# Altium PCB STM32F103_Blue_Pill_V_1_OLD.PcbDoc
Units mm, origin at the board's own origin, x right, y up, seen from the top; angles counter-clockwise.
Board outline 53.59 x 18.25 mm, 2 copper layers (Top Layer, Bottom Layer), stack 1.271 mm thick; 33 components, 50 nets, 164 pads, 22 vias.
Unrouted connection lines stored in the file: 13.
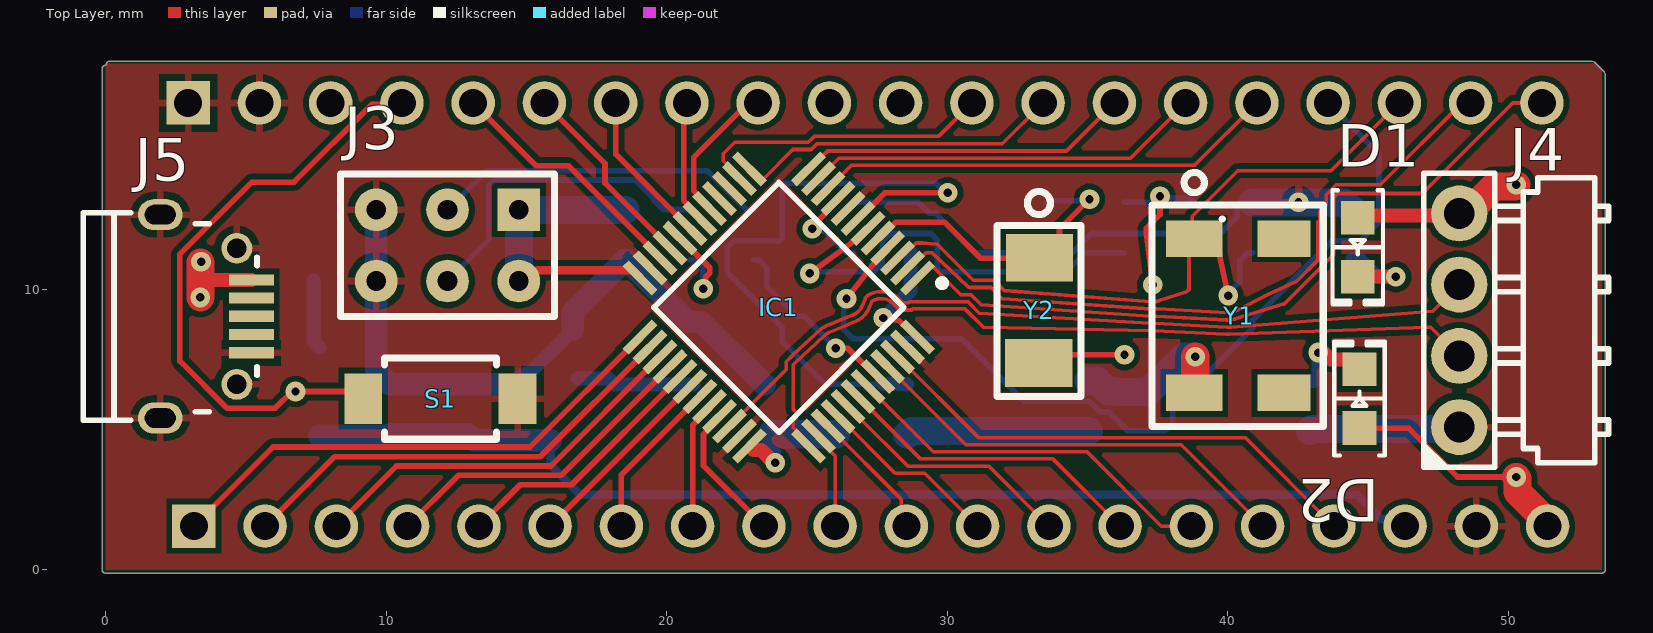
[diagram p0: Top Layer view]
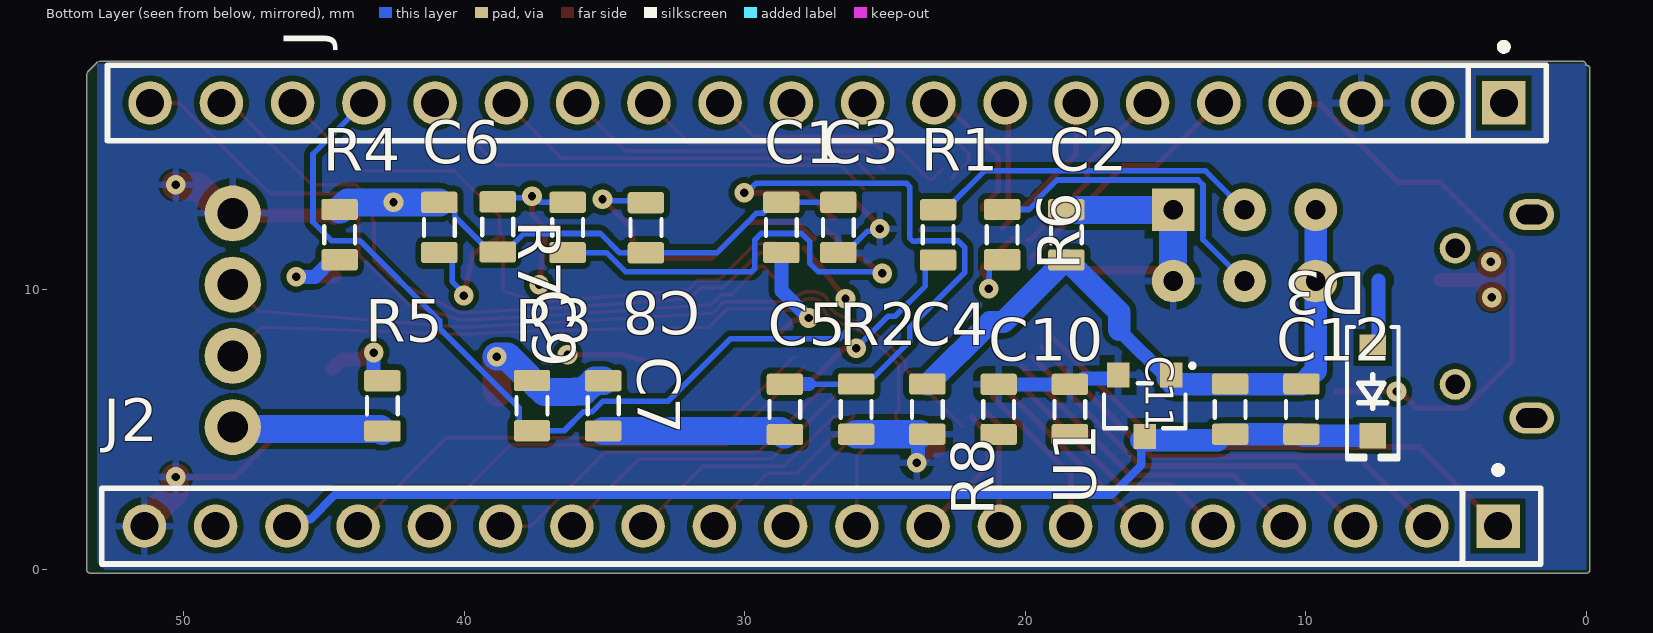
[diagram p1: Bottom Layer view, seen from below]
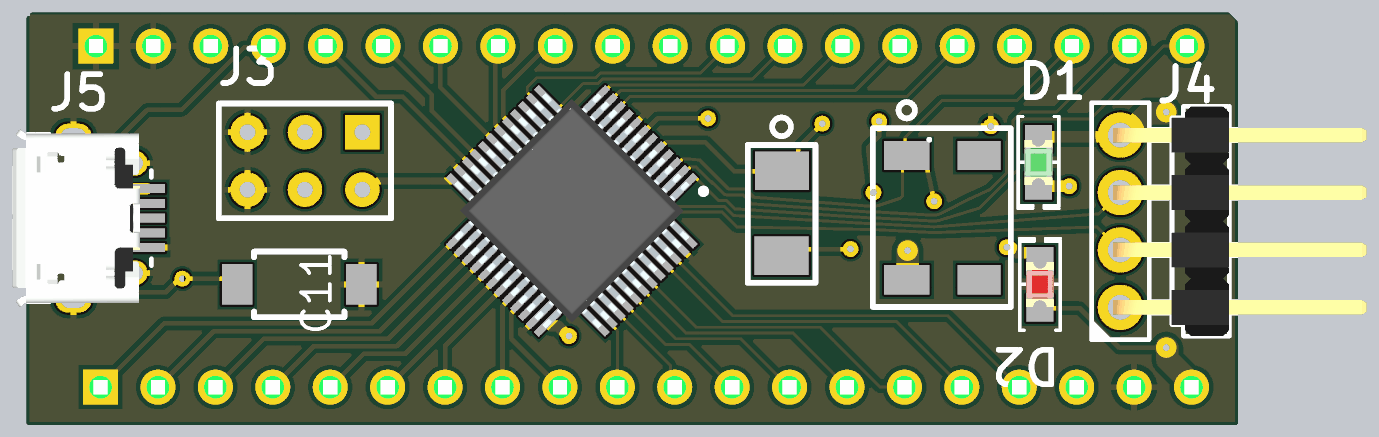
[diagram p2: 3D render of the assembled board from above, using the file's embedded part models]
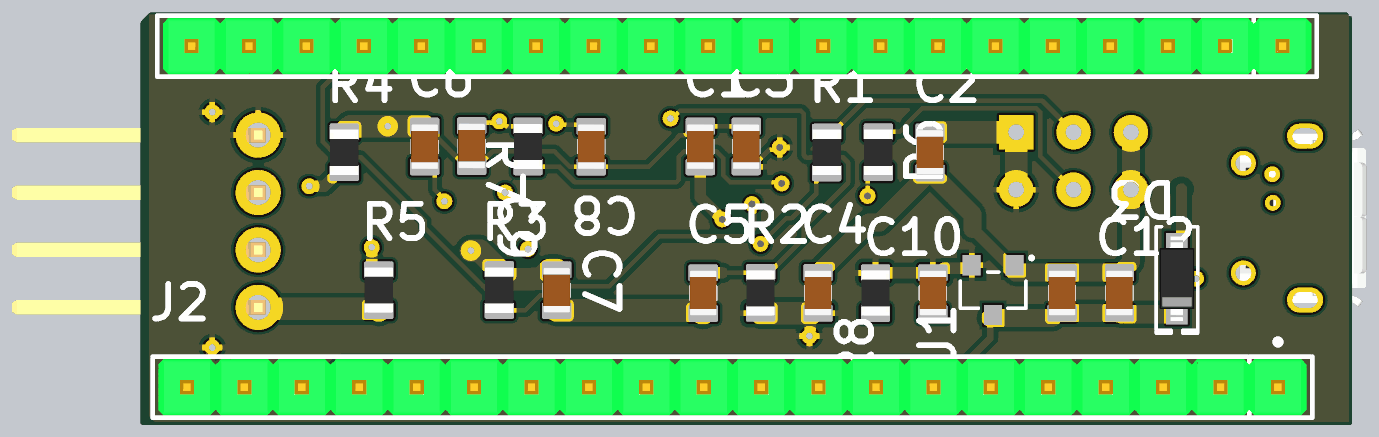
[diagram p3: 3D render of the assembled board from below, using the file's embedded part models]

## Layer stack, top to bottom
Top Solder: solder mask 0.1, Solder Resist, Dk 3.8
Top Layer: signal copper 0.0356
Dielectric 1: dielectric 1.2, FR-4, Dk 4.5
Bottom Layer: signal copper 0.0356
Bottom Solder: solder mask 0.1, Solder Resist, Dk 3.8

## Board outline
0,-0.127 cw(c0,0) -0.127,0 -0.127,17.851 cw(c0,17.851) 0.024,17.976 cw(c0.149,18) 0.149,18.127 53,18.127 53.09,18.09 53.43,17.75 53.467,17.66 53.467,0 cw(c53.34,0) 53.34,-0.127

## Design rules (kind name [scope] priority, off if disabled: settings)
Clearance Clearance_1 [OnMid vs OnMid] p1: gap=0.2 ignorepadtopadclearanceinfootprint=FALSE except(0.127: Arc-Arc Arc-Track Arc-Text Track-Track Track-Text Text-Text) sourcerule=42 cellrowname=All cellrowtype=0 cellcolname=All cellcoltype=0 innerlayers=TRUE
Clearance Clearance_2 [(ExistsOnLayer('Top Layer') Or ExistsOnLayer('Bottom Layer')) vs (ExistsOnLayer('Top Layer') Or ExistsOnLayer('Bottom Layer'))] p2: gap=0.2 ignorepadtopadclearanceinfootprint=FALSE except(0.127: Arc-Arc Arc-Track Arc-Text Track-Track Track-Text Text-Text) sourcerule=42 cellrowname=All cellrowtype=0 cellcolname=All cellcoltype=0 outerlayers=TRUE
Clearance [All] p3: gap=0.254 ignorepadtopadclearanceinfootprint=FALSE ismatrix=TRUE
DiffPairsRouting DiffPair_90 [InDifferentialPair('D_USB_D')] p1: maxlimit=0.254 minlimit=0.127 mostfreqgap=0.254 toplayer_minwidth=0.118 toplayer_maxwidth=0.254 toplayer_prefwidth=0.254 bottomlayer_minwidth=0.118 bottomlayer_maxwidth=0.254 bottomlayer_prefwidth=0.254 maxuncoupledlength=0.254
DiffPairsRouting DiffPair_90DiffPairsRouting [InDifferentialPair('D_USB_D')] p2: maxlimit=0.254 minlimit=0.254 mostfreqgap=0.254 toplayer_minwidth=0.203 toplayer_maxwidth=0.203 toplayer_prefwidth=0.203 bottomlayer_minwidth=0.203 bottomlayer_maxwidth=0.203 bottomlayer_prefwidth=0.203 maxuncoupledlength=12.7
DiffPairsRouting [All] p3: maxlimit=0.254 minlimit=0.254 mostfreqgap=0.254 toplayer_minwidth=0.381 toplayer_maxwidth=0.381 toplayer_prefwidth=0.381 bottomlayer_minwidth=0.381 bottomlayer_maxwidth=0.381 bottomlayer_prefwidth=0.381 maxuncoupledlength=12.7
HoleSize MaxMinHoleSize_JLCPCB [All] p1: absolutevalues=TRUE maxlimit=6.3 minlimit=0.3 maxpercent=80.000 minpercent=20.000
HoleSize [All] p2: absolutevalues=TRUE maxlimit=2.54 minlimit=0.025 maxpercent=80.000 minpercent=20.000
HoleToHoleClearance HoleToHoleClearance_JLCPCB [All] p1: gap=0.5 allowstackedmicrovias=TRUE
MinimumAnnularRing MinimumAnnularRing_JLCPCB [All] p1: minimumring=0.15
PolygonConnect [All] p1: connectstyle=Relief reliefconductorwidth=0.254 reliefentries=4 polygonreliefangle="90 Angle" airgapwidth=0.254
RoutingVias RoutingVia_JLCPCB [All] p1: holewidth=0.3 width=0.5 viastyle="Through Hole" minholewidth=0.3 minwidth=0.5 maxholewidth=6.3 maxwidth=6.5
RoutingVias [All] p2: holewidth=0.711 width=1.27 viastyle="Through Hole" minholewidth=0.711 minwidth=1.27 maxholewidth=0.711 maxwidth=1.27
SolderMaskExpansion [All] p1: expansion=0.102 istentingtop=FALSE
UnRoutedNet [All] p1: checkbadconnections=TRUE
Width MaxMinWidth_JLCPCB [All] p1: maxlimit=10 minlimit=0.127 preferedwidth=0.2 minimp=50.000000 maximp=50.000000 favimp=50.000000
Width [All] p2: maxlimit=0.254 minlimit=0.254 preferedwidth=0.254
26 further rules are at their usual default settings.

## Classes and differential pairs
component class Connector_page: *1 J1 J2 J3 J4 J5 R8
component class Controller_page: C1 C2 C3 C4 C5 C6 C7 C8 C9 C10 C11 C12 D1 D2 D3 IC1 P2 P3 R1 R2 R3 R4 R5 R6 R7 S1 U1 Y1 Y2
differential pair D_USB_D: +USB_D_H -USB_D_L

## Components (designator, comment, footprint, x,y, rotation, side; value= is the part's Value field where it differs from the comment)
C1 "Capacitor 4.7µF +/-40% 25V 0805" CAPC0805(2012)145_L 28.702,12.192 r270 bottom value=104
C2 "Capacitor 4.7µF +/-40% 25V 0805" CAPC0805(2012)145_L 18.542,11.938 r90 bottom value=1uF
C3 "Capacitor 4.7µF +/-40% 25V 0805" CAPC0805(2012)145_L 26.67,12.192 r270 bottom value=104
C4 "Capacitor 4.7µF +/-40% 25V 0805" CAPC0805(2012)145_L 23.495,5.715 r270 bottom value=104
C5 "Capacitor 4.7µF +/-40% 25V 0805" CAPC0805(2012)145_L 28.575,5.715 r90 bottom value=104
C6 "Capacitor 4.7µF +/-40% 25V 0805" CAPC0805(2012)145_L 40.894,12.192 r270 bottom value=15pF
C7 "Capacitor 4.7µF +/-40% 25V 0805" CAPC0805(2012)145_L 35.052,5.842 r90 bottom value=15pF
C8 "Capacitor 4.7µF +/-40% 25V 0805" CAPC0805(2012)145_L 33.528,12.192 r90 bottom value=15pF
C9 "Capacitor 4.7µF +/-40% 25V 0805" CAPC0805(2012)145_L 38.812,12.222 r90 bottom value=15pF
C10 "Capacitor 4.7µF +/-40% 25V 0805" CAPC0805(2012)145_L 18.415,5.715 r90 bottom value=0.1uF
C11 "Capacitor 4.7µF +/-40% 25V 0805" CAPC0805(2012)145_L 12.7,5.715 r270 bottom value=104
C12 "Capacitor 4.7µF +/-40% 25V 0805" CAPC0805(2012)145_L 10.16,5.715 r270 bottom value=104
D1 "Power Supply" "LED 0805_2012 GREEN" 44.64,11.493 r270 top value=Green
D2 "Test" "LED 0805_2012 RED" 44.704,6.096 r90 top value=Red
D3 "Zener 3V3" SOD-123 7.62,6.35 r270 bottom
IC1 "STM32F103C8T6XXX" QFP50P900X900X160-48N 24.003,9.347 r225 top
J1 "2-826646-0" FP-2-826646-0-MFG 27.076,16.637 r0 bottom
J2 "2-826646-0" FP-2-826646-0-MFG 27.28,1.55 r0 bottom
J3 "2x3P" "2x3P 2.54mm Pin Header -Footprint-1" 14.732,12.827 r180 top
J4 "M20-9960445" "HARWIN M20-9960445" 48.26,8.89 r90 top
J5 "MICROXNJ USB 2.0" "USB 2.0 Tupe B Micro" 2,9.029 r90 top
R1 "470R5J" RESC0805(2012)_L 23.114,11.938 r90 bottom value=10K
R2 "470R5J" RESC0805(2012)_L 26.035,5.715 r270 bottom value=10K
R3 "470R5J" RESC0805(2012)_L 37.592,5.842 r270 bottom value=47
R4 "470R5J" RESC0805(2012)_L 44.45,11.938 r270 bottom value=1K
R5 "470R5J" RESC0805(2012)_L 42.926,5.842 r90 bottom value=1K
R6 "470R5J" RESC0805(2012)_L 20.828,11.938 r270 bottom value=10K
R7 "470R5J" RESC0805(2012)_L 36.322,12.192 r270 bottom value=47
R8 "470R5J" RESC0805(2012)_L 20.955,5.715 r90 bottom value=1.5K
S1 "TS-1088-AR02016" TS-1088-AR02016-Footprint-1 11.938,6.096 r180 top
U1 "XC6206P332MR" XC6206P332MR-Footprint-1 15.748,5.842 r0 bottom
Y1 "MC-30632.7680K-A0:ROHS" MC-30632.7680K-A0:ROHS-Footprint-1 38.812,11.799 r270 top
Y2 "X50328MSB2GI" X50328MSB2GI-Footprint-1 33.274,11.066 r270 top

## Footprints (in the part's own frame and the unit in brackets; to place one, negate y for a bottom-side part, rotate by r counter-clockwise, add the part's x,y. Pads: shape width x height; smd on the part's side, far side on the other; paste and mask are expansions set on the pad)
"2x3P 2.54mm Pin Header -Footprint-1" [mil]
  rect 60x60 hole 27.56: 1(0,0)
  round 60 hole 27.56: 2(0,100) 3(100,0) 4(100,100) 5(200,0) 6(200,100)
  silkscreen extent -50,-50 250,150
CAPC0805(2012)145_L [mm] "Chip Capacitor, Body 2.0x1.2mm, Height 1.45mm, IPC High Density"
  rrect25% 0.76x1.3 smd: 1(-0.9,0) 2(0.89,0)
  silkscreen extent -0.3,-0.55 0.3,0.55, body extent -1,-0.6 1,0.6, height 1.45
FP-2-826646-0-MFG [mm]
  rect 1.55x1.55 hole 1 paste-2539.97 mask+0: 1(-24.13,0)
  round 1.55 hole 1 paste-2539.97 mask+0: 2(-21.59,0) 3(-19.05,0) 4(-16.51,0) 5(-13.97,0) 6(-11.43,0) 7(-8.89,0) 8(-6.35,0) 9(-3.81,0) 10(-1.27,0) 11(1.27,0) 12(3.81,0) 13(6.35,0) 14(8.89,0) 15(11.43,0) 16(13.97,0) 17(16.51,0) 18(19.05,0) 19(21.59,0) 20(24.13,0)
  silkscreen extent -25.65,-2.12 25.65,1.35, body extent -25.4,-1.25 25.4,1.25, height 9
"HARWIN M20-9960445" [mm] "2.54mm DIL PC TAIL PIN HEADER ASSEMBLY"
  round 2 hole 1.1: 1(-3.81,0) 2(-1.27,0) 3(1.27,0) 4(3.81,0)
  silkscreen extent -5.24,-5.33 5.24,1.3, body extent -5.08,-10.9 5.08,0.32, height 2.54
"LED 0805_2012 GREEN" [mm] "Chip Diode, 2-Leads, Body 2.00x1.25mm, IPC Medium Density"
  rect 1.2x1.2 smd: 1(-1.05,0) 2(1.05,0)
  silkscreen extent -2.03,-0.9 2.03,0.9, body extent -1,-0.63 1,0.63, height 0.9
"LED 0805_2012 RED" [mm] "Chip Diode, 2-Leads, Body 2.00x1.25mm, IPC Medium Density"
  rect 1.2x1.2 smd: 1(-1.05,0) 2(1.05,0)
  silkscreen extent -2.03,-0.9 2.03,0.9, body extent -1,-0.63 1,0.63, height 0.9
MC-30632.7680K-A0:ROHS-Footprint-1 [mm]
  rect 1.3x2 smd: 1(0,0) 2(5.5,0)
  rect 1.3x1.9 smd: 4(0,3.2) 13(5.5,3.2)
  silkscreen extent -2.36,-1.5 6.7,4.6, body extent -1,-1.3 6.5,4.4, height 1.2
QFP50P900X900X160-48N [mm]
  rect 1.475x0.3 smd: 1(-4.238,2.75) 2(-4.238,2.25) 3(-4.238,1.75) 4(-4.238,1.25) 5(-4.238,0.75) 6(-4.238,0.25) 7(-4.238,-0.25) 8(-4.238,-0.75) 9(-4.238,-1.25) 10(-4.238,-1.75) 11(-4.238,-2.25) 12(-4.238,-2.75) 25(4.238,-2.75) 26(4.238,-2.25) 27(4.238,-1.75) 28(4.238,-1.25) 29(4.238,-0.75) 30(4.238,-0.25) 31(4.238,0.25) 32(4.238,0.75) 33(4.238,1.25) 34(4.238,1.75) 35(4.238,2.25) 36(4.238,2.75)
  rect 0.3x1.475 smd: 13(-2.75,-4.238) 14(-2.25,-4.238) 15(-1.75,-4.238) 16(-1.25,-4.238) 17(-0.75,-4.238) 18(-0.25,-4.238) 19(0.25,-4.238) 20(0.75,-4.238) 21(1.25,-4.238) 22(1.75,-4.238) 23(2.25,-4.238) 24(2.75,-4.238) 37(2.75,4.238) 38(2.25,4.238) 39(1.75,4.238) 40(1.25,4.238) 41(0.75,4.238) 42(0.25,4.238) 43(-0.25,4.238) 44(-0.75,4.238) 45(-1.25,4.238) 46(-1.75,4.238) 47(-2.25,4.238) 48(-2.75,4.238)
  silkscreen extent -4.85,-3.15 3.15,3.62, body extent -4.5,-4.5 4.5,4.5, height 1.6
RESC0805(2012)_L [mm] "Chip Resistor, Body 2.0x1.3mm, IPC High Density"
  rrect25% 0.76x1.3 smd: 1(-0.9,0) 2(0.89,0)
  silkscreen extent -0.3,-0.55 0.3,0.55, body extent -1,-0.62 1,0.63, height 0.6
SOD-123 [mm] "SOD, 2-Leads, Body 1.55x3.70mm, IPC Medium Density"
  rect 0.9x0.95 smd: 1(-1.575,0) 2(1.575,0)
  silkscreen extent -2.3,-0.92 2.41,0.92, body extent -1.86,-0.78 1.86,0.77, height 1.35
TS-1088-AR02016-Footprint-1 [mm]
  rect 1.35x1.8 smd: 1(-2.75,0) 2(2.75,0)
  silkscreen extent -2,-1.45 2,1.45, body extent -2,-1.5 2,1.44, height 2.5
"USB 2.0 Tupe B Micro" [mm] "USB 2.0 Type B Micro"
  rect 0.4x1.6 smd: 1(1.3,-3.2) 2(0.65,-3.2) 3(0,-3.2) 4(-0.65,-3.2) 5(-1.3,-3.2)
  round 1.1 hole 0.7: 6(-2.425,-2.68) 9(2.425,-2.68)
  oval 1.1x1.6 hole 0.7 slot 1.1 at 90 deg: 7(-3.625,0.05) 8(3.625,0.05)
  silkscreen extent -3.7,-3.4 3.7,2.8, body extent -3.93,-2.9 3.93,2.76, height 2.78
X50328MSB2GI-Footprint-1 [mm]
  rect 1.7x2.4 smd: 1(-0.056,0.022) 2(3.7,0)
  silkscreen extent -2.41,-1.5 4.9,1.5, body extent -1.2,-1.5 4.9,1.5, height 1.2
XC6206P332MR-Footprint-1 [mm]
  rect 0.8x0.9 smd: 1(-0.95,-1.1) 2(0.95,-1.1) 3(0,1.1)
  silkscreen extent -1.77,-1.5 1.45,0.8, body extent -1.45,-0.82 1.45,0.8, height 1.2

## Part data
C1 C2 C3 C4 C5 C6 C7 C8 C9 C10 C11 C12: library part CMP-001-00080-4, "Chip Capacitor, 4.7µF +/-40%, 25V, 0805, Thickness 1.45 mm", Case/Package=0805, Max Operating Temperature=85°C, Min Operating Temperature=-55°C, Tolerance=20%, Voltage Rating=25V, Mounting Technology=SMT, Pins=2
D1: library part APHCM2012CGCK-F01, "LED GREEN CLEAR CHIP SMD", Color=Green, Current - Test=20mA, Device Package="0805 (2012 Metric)", Lens Color=Colorless, Manufacturer=Kingbright, Millicandela Rating=50mcd, Supplier Device Package="Chip LED", Supplier Part Number 1=754-1094-1-ND, Voltage - Forward (Vf) (Typ)=2.1V, ComponentLink1Description=Datasheet, ComponentLink1URL=http://www.kingbrightusa.com/images/catalog/SPEC/APHCM2012CGCK-F01.pdf, ComponentLink2Description="DigiKey Link", ComponentLink2URL=https://www.digikey.com/en/products/detail/kingbright/APHCM2012CGCK-F01/1747492, Configuration=Standard, Height (Max)=0.40mm, LastUpdated="3/11/2024 7:52:47 AM", Lens Size="1.30mm x 1.25mm", Lens Style="Rectangle with Flat Top", Lens Transparency=Clear, Lifecycle Status=Active, Minimum Order=1, Mounting Type="Surface Mount", Package / Case="0805 (2012 Metric)", Packaging=TapeAndReel, Part Number=APHCM2012CGCK-F01, Part Status=Active, PartId=241, Price=0.05, Series=-, Size / Dimension="2.00mm L x 1.25mm W", Supplier 1=DigiKey, Viewing Angle=110°, Wavelength - Dominant=570nm, Wavelength - Peak=574nm
D2: library part LTST-C170KAKT, "LED RED CLEAR SMD", Color=Red, Current - Test=20mA, Device Package="0805 (2012 Metric)", Lens Color=Colorless, Manufacturer="Lite-On Inc.", Millicandela Rating=54mcd, Supplier Part Number 1=160-1412-1-ND, Voltage - Forward (Vf) (Typ)=2V, ComponentLink1Description=Datasheet, ComponentLink1URL=http://optoelectronics.liteon.com/upload/download/DS-22-99-0182/LTST-C170KAKT.pdf, ComponentLink2Description="DigiKey Link", ComponentLink2URL=http://digikey.com/product-detail/en/lite-on-inc/LTST-C170KAKT/160-1412-1-ND/386772, Configuration=Standard, Height (Max)=1.10mm, LastUpdated="3/11/2024 7:52:22 AM", Lens Size="1.40mm x 1.25mm", Lens Style="Rectangle with Flat Top", Lens Transparency=Clear, Lifecycle Status=Active, Minimum Order=1, Mounting Type="Surface Mount", Package / Case="0805 (2012 Metric)", Packaging=TapeAndReel, Part Number=LTST-C170KAKT, Part Status=Active, PartId=305, Price=0.07, Series=-, Size / Dimension="2.00mm L x 1.25mm W", Supplier 1=DigiKey, Viewing Angle=130°, Wavelength - Dominant=615nm, Wavelength - Peak=621nm
D3: library part BZT52C3V3-HE3-18, "DIODE ZENER 3.3V 410MW SOD123", Manufacturer="Vishay Semiconductor Diodes Division", Operating Temperature="-55°C ~ 150°C", Package / Case=SOD-123, Power - Max=410mW, Supplier Part Number 1=BZT52C3V3-HE3-18GICT-ND, Tolerance=±5%, Voltage - Zener (Nom) (Vz)=3.3V, ComponentLink1Description=Datasheet, ComponentLink1URL=http://www.vishay.com/docs/85760/bzt52.pdf, ComponentLink2Description="DigiKey Link", ComponentLink2URL=http://digikey.com/product-detail/en/vishay-semiconductor-diodes-division/BZT52C3V3-HE3-18/BZT52C3V3-HE3-18GICT-ND/7717359, Impedance (Max) (Zzt)="80 Ohms", LastUpdated="3/11/2024 7:47:45 AM", Lifecycle Status=Active, Minimum Order=1, Mounting Type="Surface Mount", Packaging=TapeAndReel, Part Number=BZT52C3V3-HE3-18, Part Status=Active, PartId=1614, Price=0.04, Series="Automotive, AEC-Q101", Supplier 1=DigiKey, Supplier Device Package=SOD-123
IC1: "Integrated Circuit", Manufacturer_Name=ST, Height=1.6mm, Manufacturer_Part_Number=STM32F103C8T6XXX
J1 J2: library part CMP-03369-000139-1, "CONN HEADER VERT 20POS 2.54MM", Color=Green, Current Rating=3A, Flammability Rating="UL94 V-0", High Temperature Housing=No, Max Operating Temperature=105°C, Min Operating Temperature=-65°C, Package Quantity=300, Board Standoff="No (Without)", Connector Type=Plug, Contact Gender=Male, Contact Material=Bronze, Contact Mating Length=5.8mm, Contact Plating=Gold, Contact Post Length=0.1259inch, Contact Protection="No (Without)", Contact Shape=Square, Contact Type="Male Pin", Depth=2.5mm, ELV=Compliant, Gasket="No (Without)", High Speed Serial Data Connector=No, Housing Color=Green, Housing Material=PBT, Keyed=No, Length=50.8mm, Mating Alignment="No (Without)", Mating Connector Lock="No (Without)", Mount="Straddle Mount", Number of Contacts=20, Number of Positions=20, Number of Rows=1, Orientation=Straight, Packaging=Carton, PCB Mount Retention=Without, PCB Mounting Orientation=Vertical, Pitch=2.54mm, Plating Thickness=0.8um, Radiation Hardening=No, RoHS Compliant=Yes, Row Spacing=2.54mm, Selectively Loaded="No (Without)", Series="AMPMODU MOD II", Stabilizers="No (Without)", Strain Relief="No (Without)", Termination="Through Hole"
J3: library part CMP-002-00390-1, "PZ254-2-03-Z-8.5", Case/Package="Plugin, P=2.54mm", Max Current Rating=3A, Connector Type="Pin Header", Gender=Male, Mounting Technology=TH, Pins=6, RoHS Compliant=Yes
J4: "CONN HEADER R/A 4POS 2.54MM", Current Rating (Amps)="3A per Contact", Insulation Color=Black, Manufacturer="Harwin Inc.", Material Flammability Rating="UL94 V-0", Operating Temperature="-40°C ~ 105°C", Supplier Part Number 1=952-3286-ND, ComponentLink1Description=Datasheet, ComponentLink1URL=https://cdn.harwin.com/pdfs/Harwin_PC_Connectors_M20.pdf, ComponentLink2Description="DigiKey Link", ComponentLink2URL=https://www.digikey.com/en/products/detail/harwin-inc/M20-9960445/3921052, Connector Type="Header, Cuttable", Contact Finish - Mating=Gold, Contact Length - Mating="0.240\" (6.10mm)", Contact Length - Post="0.118\" (3.00mm)", Contact Material=Brass, Contact Shape=Square, Contact Type="Male Pin", Fastening Type=Push-Pull, Insulation Height="0.100\" (2.54mm)", Insulation Material="Polyamide (PA6T), Nylon 6T", LastUpdated="9/21/2022 7:23:20 PM", Lifecycle Status=Active, Minimum Order=1, Mounting Type="Through Hole, Right Angle", Number of Positions=4, Number of Positions Loaded=All, Number of Rows=1, Packaging=Bulk, Part Number=M20-9960445, Part Status=Active, PartId=167, Pitch - Mating="0.100\" (2.54mm)", Price=0.11, Row Spacing - Mating="-40°C ~ 105°C", Series=M20, Shrouding=Unshrouded, Style="Board to Board or Cable", Supplier 1=DigiKey, Termination=Solder
J5: library part CMP-002-00071-9, "1A USB 2.0 1 Surface Mount 5P Female -20℃~+85℃ Micro-B SMD USB Connectors ROHS", Case/Package="USB 2.0", Max Current Rating=1A, Max Operating Temperature=85°C, Min Operating Temperature=-25°C, Connector Type=Micro-B, Gender=Female, Mounting Technology=SMD, Pins=9, RoHS Compliant=Yes
R1 R2 R3 R4 R5 R6 R7 R8: library part CMP-009-00102-2, "470R 0.125W 5% 0805 (2012 Metric)  SMD", Case/Package=0805, Power=125mW, Tolerance=5%, Mounting Technology=SMT, Pins=2
S1: library part CMP-011-00069-3, "NO 50mA 100MΩ 100000 Times 12V 160gf@±50gf Brick nogging SPST SMD Tactile Switches ROHS", Case/Package=SMD, Current Rating=50mA, Voltage Rating=12V, Pins=2, RoHS Compliant=Yes, Throw Configuration=SPST
U1: library part CMP-019-00049-3, "200mA Fixed 3.3V Positive 6V SOT-23-3L Linear Voltage Regulators (LDO) ROHS", Case/Package=SOT-23-3L, Dropout Voltage=680mV, Output Current=200mA, Output Voltage=3.3V, Pins=3
Y1: library part CMP-003-00031-7, "32.768 kHz ±20ppm Crystal 12.5pF 50 kOhms 4-SOJ, 5.50mm pitch", Case/Package="4-SOJ 5.50mm pitch", Frequency=32.768kHz, Load Capacitance=12.5pF, Max Operating Temperature=85°C, Min Operating Temperature=-40°C, ESR=50k, Mounting Technology="PARALLEL - FUNDAMENTAL", Pins=4, RoHS Compliant=Yes
Y2: library part CMP-003-00032-3, "8MHz 20pF ±10ppm SMD5032-2P Crystals ROHS", Case/Package=SMD5032-2P, Frequency=8MHz, Load Capacitance=20pF, Max Operating Temperature=125°C, Min Operating Temperature=-40°C, ESR=80, Mounting Technology=SMD, Pins=2, RoHS Compliant=Yes

## Via types
v1: diameter 0.7, hole 0.3, Top Layer to Bottom Layer, 22 vias

## Nets (pads, with @x,y where several pads share a name; then routed paths per layer and width w, separated by ;. In a path a pad name is that pad's centre, name@x,y a point inside that pad or via, vN(x,y) a via of type N, cw(c..) or ccw(c..) an arc to the next point about the centre after c; other vN are vias at no path point)
+3V3: C1.2 C2.2 C3.2 C4.2 C10.2 D1.1 D2.1 IC1.9 IC1.24 IC1.36 IC1.48 J1.3 J2.20 J3.1 J3.2 J4.4 R2.2 R8.2 U1.2 | length 42.1
  Top Layer w0.2: IC1.36 22.953,4.408 23.104,4.257 ; v1(25.192,12.153) 25.192,12.233 26.116,13.157 IC1.9 ; v1(27.731,8.97) 28.3,8.869 28.458,8.71 IC1.48 ; D2.1 46.456,5.046 48.2,3.302 v1(50.292,3.302)
  Top Layer w0.3: J3.2 15.009,10.287 15.395,10.673 18.788,10.673 IC1.24
  Top Layer w0.5: 23.104,4.257 23.375,4.257 23.822,3.81 v1(23.876,3.81) ; D1.1 44.719,12.622 48.182,12.622 J4.4
  Top Layer w1: J4.4 48.531,12.7 49.495,13.664 50.24,13.664 v1(50.292,13.716) ; v1(50.292,3.302) 50.344,3.25 50.344,2.765 51.41,1.699 J2.20
  Bottom Layer w0.2: v1(25.192,12.153) 25.288,12.057 25.645,12.057 26.4,11.302 C3.2
  Bottom Layer w0.5: U1.2@16.825,6.815 17.935,6.815 18.145,6.605 C10.2 R8.2 ; C4.2 23.765,4.825 23.838,4.752 23.838,3.848 v1(23.876,3.81) ; v1(27.731,8.97) 28.702,9.942 C1.2
  Bottom Layer w1: J3.2 J3.1 C2.2 ; C4.2@23.765,4.825 R2.2
+5V: C11.2 C12.2 D3.2 J2.18 U1.3 | length 40.6
  Bottom Layer w0.3: U1.3@15.875,4.615 15.875,3.715 16.915,2.675 44.609,2.675 45.495,1.789 46.09,1.789 J2.18
  Bottom Layer w0.8: D3.2 10.11,4.775 C12.2 C11.2 12.93,4.825 13.14,4.615 U1.3@15.875,4.615
BOOT0: J3.3 R1.2 | length 12.1
  Bottom Layer w0.2: J3.3 13.581,14.216 21.456,14.216 22.844,12.828 R1.2
BOOT1: J3.4 R6.1 | length 11.7
  Bottom Layer w0.2: J3.4 13.675,11.77 13.675,11.936 13.67,11.941 13.67,13.713 13.846,13.889 18.88,13.889 19.569,13.199 19.569,13.147 19.878,12.838 R6.1
GND: C1.1 C2.1 C3.1 C4.1 C5.1 C6.1 C7.1 C8.1 C9.1 C10.1 C11.1 C12.1 IC1.8 IC1.23 IC1.35 IC1.47 J1.1 J1.2 J2.19 J3.5 J3.6 J4.1 J5.5 J5.6 J5.7 J5.8 J5.9 R4.1 R5.1 S1.1 U1.1 | length 55.8
  Bottom Layer w0.2: C3.1 C1.1 28.972,13.092 29.364,12.7 29.601,12.7 29.718,12.583 29.718,12.573 30.999,11.292 C8.1 34.464,11.292 35.154,11.982 37.881,11.982 38.542,11.322 C9.1 39.082,11.322 40.344,12.584 40.344,12.812 40.624,13.092 C6.1
  Bottom Layer w0.5: U1.1@14.925,6.815 16.659,8.549
  Bottom Layer w0.8: J3.5 J3.6 9.652,7.093 10.13,6.615 C12.1 C11.1 14.725,6.615 U1.1@14.925,6.815 ; 16.659,8.549 16.659,9.185 18.512,11.038 C2.1 18.572,11.038 20.783,8.827 21.253,8.827 23.465,6.615 C4.1
  Bottom Layer w1: C5.1 28.605,4.815 28.732,4.942 C7.1 ; C6.1 44.166,13.092 44.42,12.838 R4.1 ; R5.1 42.995,5.011 48.191,5.011 J4.1
  other v1: 42.53,13.092
NetC7_2: C7.2 R3.1 Y1.2 | length 5.4
  Top Layer w1: Y1.2 38.849,6.449 v1(38.849,7.591)
  Bottom Layer w1: C7.2 35.366,6.732 35.749,6.349 36.072,6.349 36.096,6.325 37.145,6.325 R3.1@37.442,6.622 ; R3.1@37.742,6.862 38.471,7.591 v1(38.849,7.591)
NetC9_2: C9.2 R7.1 Y2.2 | length 9.1
  Top Layer w0.2: Y2.2 34.374,7.66 v1(36.326,7.66) ; v1(37.338,10.16) 37.11,12.007 37.11,12.172 37.592,12.654 v1(37.592,13.31)
  Bottom Layer w0.2: R7.1 37.293,13.092 37.511,13.31 v1(37.592,13.31) 37.649,13.252 38.671,13.252 C9.2
NetD1_2: D1.2 R4.2 | length 3.2
  Top Layer w0.5: D1.2 45.995,10.443 v1(45.999,10.439)
  Bottom Layer w0.5: R4.2 44.72,11.048 45.329,10.439 v1(45.999,10.439)
NetD2_2: D2.2 R5.2 | length 3
  Top Layer w0.5: v1(43.237,7.738) 43.445,7.738 43.687,7.496 44.354,7.496 D2.2
  Bottom Layer w0.5: R5.2 43.107,6.732 43.237,6.862 v1(43.237,7.738)
NetIC1_20: IC1.20 R6.2 | length 3.7
  Top Layer w0.2: IC1.20 20.486,11.814 21.538,10.761 21.538,10.579 21.401,10.442 21.401,10.107 v1(21.305,10.011)
  Bottom Layer w0.2: R6.2 21.014,11.048 21.294,10.768 21.294,10.022 v1(21.305,10.011)
NetIC1_44: IC1.44 R1.1 | length 6.5
  Top Layer w0.2: v1(26.038,7.89) 26.461,7.89 27.47,6.881 IC1.44
  Bottom Layer w0.2: R1.1 23.289,11.038 23.569,10.758 23.569,10.115 24.653,9.031 24.897,9.031 v1(26.038,7.89)
NRST: C5.2 IC1.7 J1.4 R2.1 S1.2 | length 44
  Top Layer w0.2: S1.2@8.934,6.35 v1(6.77,6.35) 6.64,6.35 6.044,5.754 4.328,5.754 2.651,7.431 2.651,11.249 5.216,13.814 6.723,13.814 9.491,16.582 10.511,16.582 J1.4 ; IC1.7 26.868,12.521 27.784,13.437 v1(30.023,13.437)
  Bottom Layer w0.2: 27.725,6.61 25.648,6.61 24.13,8.128 24.13,8.623 22.164,10.589 22.164,11.487 22.395,11.718 23.833,11.718 23.847,11.703 24.013,11.703 24.13,11.821 24.13,13.655 24.247,13.772 29.606,13.772 29.942,13.437 v1(30.023,13.437)
  Bottom Layer w0.5: 27.725,6.61 28.57,6.61 C5.2
PA0-WKUP: IC1.10 J1.16 | length 16.5
  Top Layer w0.13: IC1.10 26.592,14.412 38.821,14.412 J1.16
PA1: IC1.11 J1.15 | length 14.2
  Top Layer w0.13: IC1.11 26.142,14.669 36.538,14.669 J1.15
PA2: IC1.12 J1.14 | length 11.9
  Top Layer w0.13: IC1.12 25.1,14.288 25.737,14.926 34.255,14.926 J1.14
PA3: IC1.13 J1.13 | length 11.8
  Top Layer w0.127: IC1.13 23.322,13.917 23.442,13.917 24.503,14.978 25.158,14.978 25.361,15.181 31.97,15.181 J1.13
PA4: IC1.14 J1.12 | length 10.7
  Top Layer w0.127: IC1.14 22.597,14.006 22.023,14.58 22.023,14.828 22.43,15.235 25.051,15.235 25.26,15.443 29.693,15.443 J1.12
PA5: IC1.15 J1.11
PA6: IC1.16 J1.10
PA7: IC1.17 J1.9 | length 5.3
  Top Layer w0.2: IC1.17 21.537,12.945 20.963,13.519 20.963,14.692 23.009,16.739 23.19,16.739 23.19,16.713 J1.9
PA8: IC1.29 J2.5 | length 9.4
  Top Layer w0.203: J2.5 14.782,3.023 16.618,3.023 IC1.29
PA9: IC1.30 J2.6 | length 7
  Top Layer w0.203: J2.6 15.851,1.55 20.828,6.527 IC1.30
PA10: IC1.31 J2.7 | length 5.8
  Top Layer w0.203: J2.7 18.39,3.38 IC1.31
PA15: IC1.38 J2.10 | length 3.5
  Top Layer w0.127: IC1.38 25.409,4.649 26.01,4.048 J2.10
PB0: IC1.18 J1.8 | length 4.4
  Top Layer w0.2: J1.8 20.609,16.52 20.609,13.165 21.183,12.591 IC1.18
PB1: IC1.19 J1.7 | length 5.6
  Top Layer w0.2: J1.7 18.186,14.81 IC1.19
PB3: IC1.39 J2.11 | length 4.7
  Top Layer w0.127: IC1.39 28.36,2.516 28.36,1.74 J2.11
PB4: IC1.40 J2.12 | length 6.6
  Top Layer w0.127: IC1.40 28.146,3.437 29.203,3.437 J2.12
PB5: IC1.41 J2.13 | length 8.5
  Top Layer w0.127: IC1.41@26.714,5.454 26.836,5.454 28.599,3.691 31.489,3.691 J2.13
PB6: IC1.42 J2.14 | length 11.3
  Top Layer w0.127: IC1.42 29.052,3.945 33.775,3.945 J2.14
PB7: IC1.43 J2.15 | length 13.6
  Top Layer w0.127: IC1.43 29.505,4.199 34.99,4.199 37.638,1.55 J2.15
PB8: IC1.45 J2.16 | length 15.7
  Top Layer w0.127: IC1.45 30.665,4.453 38.347,4.453 J2.16
PB9: IC1.46 J2.17 | length 18.1
  Top Layer w0.127: IC1.46 31.118,4.707 40.633,4.707 J2.17
PB10: IC1.21 J1.6 | length 6.7
  Top Layer w0.2: J1.6 17.806,14.478 17.806,13.777 19.82,11.763 IC1.21@19.891,11.763
PB11: IC1.22 J1.5 | length 9
  Top Layer w0.2: J1.5 15.346,14.397 16.507,14.397 19.769,11.135 IC1.22
PB12: IC1.25 J2.1 | length 18.7
  Top Layer w0.203: J2.1 5.968,4.369 15.136,4.369 IC1.25
PB13: IC1.26 J2.2 | length 16.4
  Top Layer w0.203: J2.2 8.163,4.024 15.497,4.024 IC1.26
PB14: IC1.27 J2.3 | length 14
  Top Layer w0.203: J2.3 10.373,3.694 15.875,3.694 IC1.27
PB15: IC1.28 J2.4 | length 11.7
  Top Layer w0.203: J2.4 12.583,3.364 16.252,3.364 IC1.28
PC13: IC1.2 J1.19 | length 25
  Top Layer w0.13: IC1.2 29.126,11.168 29.25,11.292 29.469,11.292 30.737,10.095 ccw(c30.826,10.189) 30.826,10.059 31.571,10.059 31.935,9.695 31.973,9.657 37.278,9.29 ccw(c37.338,10.16) 37.473,9.298 37.482,9.298 cw(c37.482,9.168) 37.49,9.298 39.989,9.156 ccw(c40.024,9.77) 40.304,9.223 41.457,9.814 42.467,10.28 43.227,11.039 43.227,12.399 43.283,12.455 43.283,12.76 43.518,12.996 43.518,13.36 43.875,13.716 45.441,13.716 48.362,16.637 J1.19
SWCLK: IC1.37 J4.2 | length 28.7
  Top Layer w0.127: IC1.37 25.055,4.528 24.518,5.066 24.518,5.284 24.625,5.391 24.625,5.601 24.518,5.708 24.518,7.249 24.518,7.302 24.592,7.376 25.618,8.337 cw(c26.038,7.89) 25.683,8.39 cw(c26.038,7.89) 25.802,8.456 26.75,8.851 ccw(c26.416,9.652) 27.213,9.309 27.323,9.565 cw(c27.653,9.048) 27.345,9.578 cw(c27.653,9.048) 28.088,9.481 28.314,9.254 28.743,9.254 28.781,9.293 30.641,9.293 31.261,8.673 31.298,8.636 37.307,8.522 ccw(c37.338,10.16) 37.356,8.522 cw(c37.357,8.395) 37.363,8.521 39.954,8.39 ccw(c40.024,9.77) 40.072,8.389 47.14,8.635 47.245,8.635 J4.2
SWDIO: IC1.34 J4.3 | length 28.8
  Top Layer w0.127: IC1.34 24.264,7.133 24.264,7.407 24.487,7.63 25.512,8.585 25.59,8.633 cw(c26.038,7.89) 25.614,8.647 25.658,8.671 25.704,8.69 26.651,9.085 ccw(c26.416,9.652) 26.979,9.409 27.09,9.665 27.109,9.71 27.143,9.744 27.164,9.765 27.174,9.773 27.18,9.776 27.216,9.797 cw(c27.653,9.048) 27.243,9.812 cw(c27.653,9.048) 28.104,9.789 28.193,9.735 28.42,9.508 28.638,9.508 28.676,9.547 30.746,9.547 31.149,9.144 37.255,8.778 ccw(c37.338,10.16) 37.394,8.777 37.396,8.777 cw(c37.396,8.65) 37.403,8.776 39.965,8.644 ccw(c40.024,9.77) 40.113,8.646 47.316,9.216 J4.3
USB_D_H: IC1.33 J2.9 J5.3 R8.1 | length 5
  Top Layer w0.203: IC1.33 21.89,5.398 21.315,4.823 21.315,3.705 J2.9
USB_D_L: IC1.32 J2.8 J5.2 | length 4.5
  Top Layer w0.203: J2.8 20.93,5.145 21.537,5.752 IC1.32
VBAT: IC1.1 J1.20 | length 27.3
  Top Layer w0.13: IC1.1 29.36,10.815 29.48,10.815 30.493,9.802 30.852,9.802 31.216,9.438 37.263,9.034 ccw(c37.338,10.16) 37.437,9.035 37.442,9.035 cw(c37.442,8.905) 37.449,9.035 39.977,8.899 ccw(c40.024,9.77) 40.279,8.936 42.022,9.471 43.775,11.225 43.775,13.253 43.931,13.409 46.937,13.409 50.165,16.637 J1.20
VCCIN: D3.1 J5.1 | length 5.5
  Top Layer w0.5: 3.378,10.325 3.382,10.329 J5.1
  Top Layer w1: v1(3.378,9.703) 3.378,10.325 v1@3.378,10.947
  Bottom Layer w0.5: 7.417,10.312 7.417,8.125 7.617,7.925 D3.1
  other v1: 3.404,10.973
XTALA: C8.2 IC1.5 Y2.1 | length 11.4
  Top Layer w0.2: IC1.5 27.601,11.814 28.175,12.388 29.903,12.388 31.191,11.1 34.004,11.1 34.008,11.096 34.008,12.138 v1(35.077,13.208)
  Bottom Layer w0.2: C8.2 33.597,13.151 35.02,13.151 v1(35.077,13.208)
XTALB: IC1.6 R7.2 | length 16.3
  Top Layer w0.2: v1(25.104,10.559) 26.532,11.593 26.69,11.752 IC1.6
  Bottom Layer w0.2: v1(25.104,10.559) 25.167,10.622 27.389,10.622 27.686,10.919 27.686,11.685 27.983,11.982 29.421,11.982 29.652,11.751 29.652,10.729 29.769,10.612 34.247,10.612 34.937,11.302 R7.2
XTALC: C6.2 IC1.3 J1.18 Y1.1 | length 27.7
  Top Layer w0.13: IC1.3 28.771,11.524 28.896,11.645 29.116,11.645 29.646,11.599 30.929,10.316 31.677,10.316 32.042,9.952 37.291,9.547 ccw(c37.338,10.16) 37.532,9.576 38.549,9.914 38.587,9.952 38.625,9.99 38.625,11.122 38.62,11.127 38.62,11.849 38.738,11.968 38.738,12.598 40.364,14.224 43.686,14.224 46.099,16.637 J1.18
  Top Layer w0.2: Y1.1 39.712,11.249 v1(40.024,9.77)
  Bottom Layer w0.2: v1(40.024,9.77) 40.024,9.858 40.439,10.274 40.439,11.022 40.719,11.302 C6.2
XTALD: IC1.4 J1.17 R3.2 | length 32.6
  Top Layer w0.2: v1(26.416,9.652) 27.31,10.815 27.468,10.974 IC1.4
  Bottom Layer w0.2: v1(26.416,9.652) 26.322,9.558 26.322,8.551 26.644,8.229 30.512,8.229 32.736,6.005 35.065,6.005 35.448,5.622 35.771,5.622 36.441,4.952 R3.2 37.767,4.952 38.047,5.232 38.047,5.762 40.889,8.604 40.889,8.886 43.731,11.728 44.739,11.728 45.4,12.389 45.4,14.823 J1.17
pads on no net: J5.4 Y1.4 Y1.13

## Polygon pours and split planes (outlines as drawn)
GND on Top Layer "GND_L01_P000" (solid, pour order 0): 0,0 0,18.034 53.086,18.034 53.34,17.78 53.34,0
+3V3 on Bottom Layer "+3V3_L02_P003" (solid, pour order 3): 0,18.034 53.086,18.034 53.086,0.254 52.832,0 0,0